# EAGLE board FT232-Breakout-v1 (EAGLE 6.4)
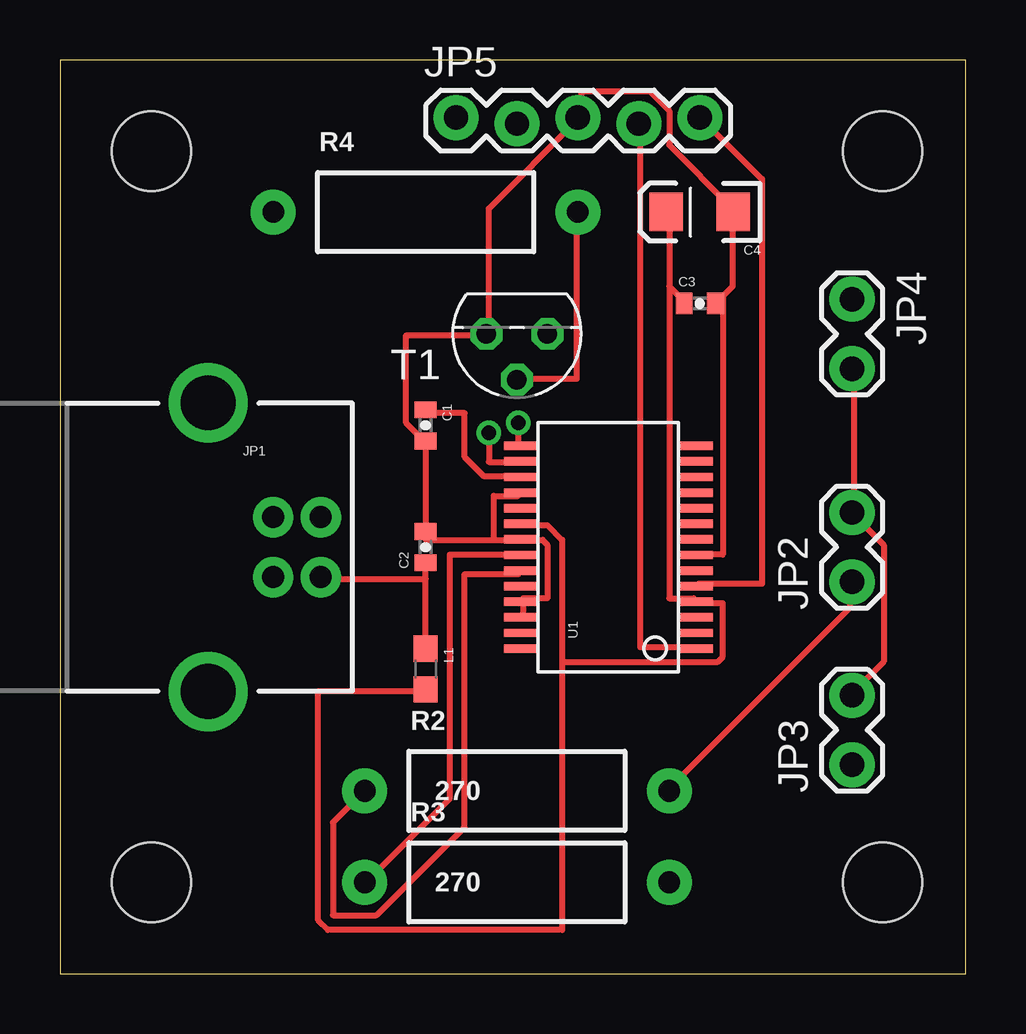
[diagram p0: board, top side]
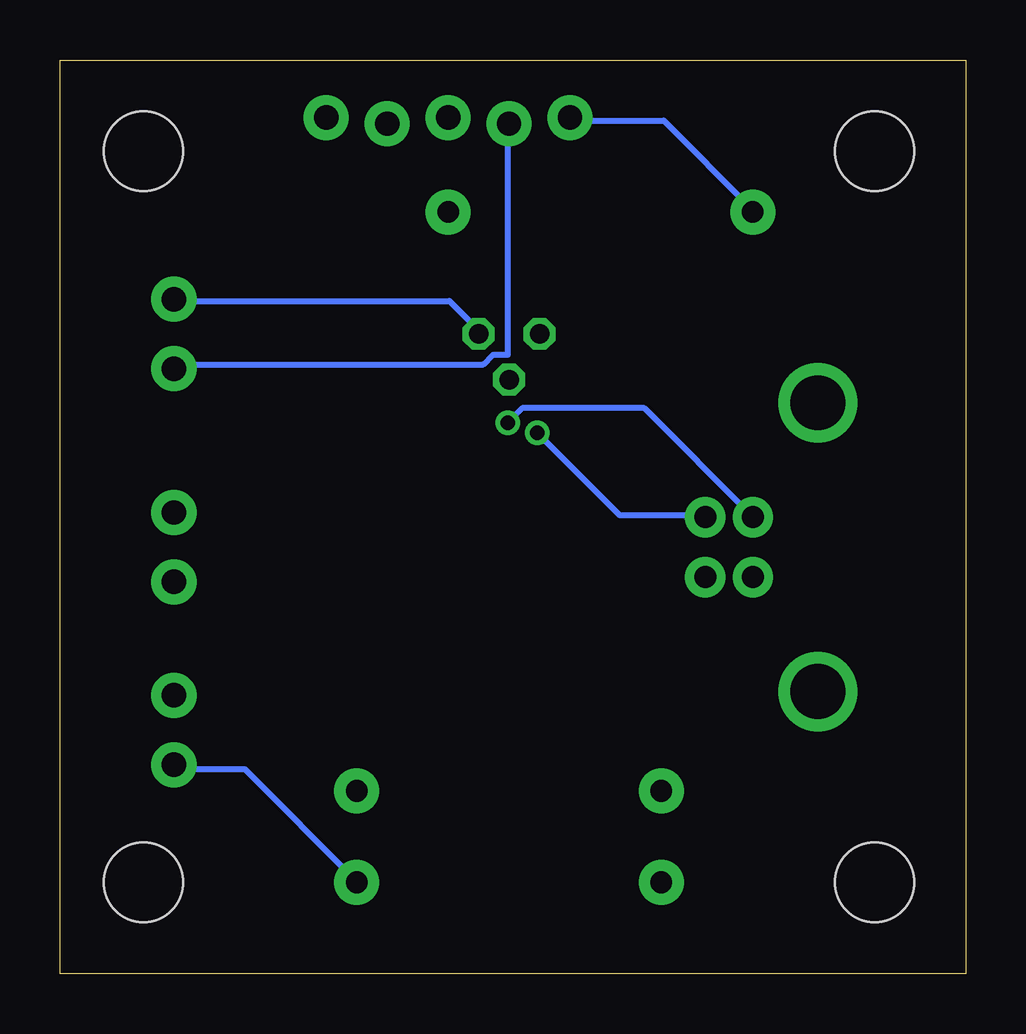
[diagram p1: board, bottom side, seen from below]

Size 37.77 x 38.09 mm. Coordinates in mm from the lower left corner, seen from the top.
Outline: 0,0 37.77,0 37.77,38.09 0,38.09 0,0
Copper layers (1*16): Top 0.035mm / dielectric 1.5mm / Bottom 0.035mm
Design rules "default": minimum track width 10mil, minimum drill 24mil, track to track 8mil, track to pad 8mil, pad to pad 8mil, via to via 8mil, smd to smd 8mil, copper to edge 40mil, drill to drill 8mil, minimum pad ring 10mil, minimum via ring 8mil, stop-mask expansion 4mil, vias tented up to drill 0mil, thermal gap 10mil

## Footprints (pad centres in the part's own frame; a part is rotated, then mirrored left to right if it is on the bottom)
0402-CAP = smd 0.7 x 0.9: 1 -0.65,0; 2 0.65,0
EIA3216 = smd 1.4 x 1.6: A 1.4,0; C -1.4,0
USB-B-PTH = drill 0.914 pad 1.676: D+ 0,1.25; D- 1.981,1.25; GND 0,-1.25; VBUS 1.981,-1.25 | drill 2.286: S1 -2.718,-6.02; S2 -2.718,6.02
1X02_LOCK = drill 1.016 pad 1.88: 1 -0.178,0; 2 2.718,0
1X05_LOCK = drill 1.016 pad 1.88: 1 0,0.127; 2 2.54,-0.127; 3 5.08,0.127; 4 7.62,-0.127; 5 10.16,0.127
0603 = smd 1.1 x 1: 1 -0.85,0; 2 0.85,0
AXIAL-0.5 = drill 0.9 pad 1.88: P$1 -6.35,0; P$2 6.35,0
TO92 = drill 0.813 octagon: 1 1.27,0; 2 0,1.905; 3 -1.27,0
SSOP28DB = smd 0.348 x 1.397: 1 -4.225,-3.656; 2 -3.575,-3.656; 3 -2.925,-3.656; 4 -2.275,-3.656; 5 -1.625,-3.656; 6 -0.975,-3.656; 7 -0.325,-3.656; 8 0.325,-3.656; 9 0.975,-3.656; 10 1.625,-3.656; 11 2.275,-3.656; 12 2.925,-3.656; 13 3.575,-3.656; 14 4.225,-3.656; 15 4.225,3.656; 16 3.575,3.656; 17 2.925,3.656; 18 2.275,3.656; 19 1.625,3.656; 20 0.975,3.656; 21 0.325,3.656; 22 -0.325,3.656; 23 -0.975,3.656; 24 -1.625,3.656; 25 -2.275,3.656; 26 -2.925,3.656; 27 -3.575,3.656; 28 -4.225,3.656
STAND-OFF = hole 3.302: 0,0

## Placement (x,y rotation side)
C1  0.1uF  [0402-CAP]  15.24,22.86 270 top
C2  10nF  [0402-CAP]  15.24,17.78 90 top
C3  0.1nF  [0402-CAP]  26.67,27.94 0 top
C4  10uF  [EIA3216]  26.67,31.75 180 top
JP1  USB-B  [USB-B-PTH]  8.89,17.78 0 top
JP2  TXLED  [1X02_LOCK]  33.02,16.51 90 top
JP3  RXLED  [1X02_LOCK]  33.02,8.89 90 top
JP4  Buzzer  [1X02_LOCK]  33.02,27.94 270 top
JP5  [1X05_LOCK]  16.51,35.56 0 top
L1  [0603]  15.24,12.7 270 top
R2  270  [AXIAL-0.5]  19.05,7.62 0 top
R3  270  [AXIAL-0.5]  19.05,3.81 0 top
R4  [AXIAL-0.5]  15.24,31.75 0 top
T1  BC547  [TO92]  19.05,26.67 180 top
U1  FT232RL-BASICSSOP  [SSOP28DB]  22.86,17.78 90 top
U$1  [STAND-OFF]  34.29,3.81 0 top
U$2  [STAND-OFF]  34.29,34.29 0 top
U$3  [STAND-OFF]  3.81,34.29 0 top
U$4  [STAND-OFF]  3.81,3.81 0 top

## Library data of the parts
C1-C3 = SparkFun-Capacitors; PROD_ID: CAP-09885
C4 = SparkFun-Capacitors; PROD_ID: CAP-00811
JP1 = SparkFun-Connectors; PROD_ID: CONN-08278
JP2-JP5 = SparkFun-Connectors
L1 R2-R4 = SparkFun-Passives
T1 = transistor
U1 = SparkFun-DigitalIC
U$1-U$4 = SparkFun-Electromechanical

## Nets
3.3V: C1.1 U1.17
BUZZIN: JP5.1 R4.P$1
GND: C1.2 C2.2 C3.2 C4.C JP5.3 T1.1 U1.7 U1.18 U1.21 U1.25 U1.26
N$1: C2.1 JP1.VBUS L1.1
N$2: R4.P$2 T1.2
N$3: JP3.1 R3.P$2
N$4: JP1.D- U1.16
N$5: JP1.D+ U1.15
N$6: JP4.1 T1.3
N$7: R3.P$1 U1.22
N$8: R2.P$1 U1.23
N$9: JP2.1 R2.P$2
RX: JP5.5 U1.5
TX: JP5.4 U1.1
V5: C3.1 C4.A L1.2 U1.4 U1.20
VCC: JP2.2 JP3.2 JP4.2 JP5.2

## Tracks (layer width: path | path; a pad name or v marks a point on that pad's centre or on a via)
3.3V
  Top 0.254: C1.1 15.24,23.37 16.87,23.37 16.87,21.54 17.68,20.73 19.1,20.73 U1.17
BUZZIN
  Bottom 0.254: R4.P$1 8.94,31.9 12.6,35.56 16.46,35.56 JP5.1
GND
  Top 0.254: 27.64,28.25 28.04,28.65 28.04,31.7 C4.C 28.04,31.9 25.4,34.54 25.4,35.97 24.59,36.78 21.74,36.78 21.74,35.76 JP5.3 21.54,35.56 17.88,31.9 17.88,26.82 T1.1 17.68,26.62 14.43,26.62 14.43,22.96 15.24,22.15 | 27.64,28.25 27.43,28.04 C3.2 27.64,28.25 | 27.64,28.25 27.64,17.48 26.62,17.48 U1.7 | U1.26 19.3,14.83 19.3,15.44 U1.25 19.3,15.65 20.32,15.65 20.32,17.88 20.12,18.09 19.3,18.09 U1.21 19.1,18.09 18.09,18.09 | 15.24,22.15 C2.2 15.24,18.09 18.09,18.09 | 18.09,18.09 18.09,19.91 19.1,19.91 U1.18 | 15.24,22.15 C1.2
N$1
  Top 0.254: L1.1 15.24,16.46 | 15.24,16.46 C2.1 | 15.24,16.46 10.97,16.46 JP1.VBUS
N$2
  Top 0.254: T1.2 19.1,24.79 21.54,24.79 21.54,31.7 R4.P$2
N$3
  Bottom 0.254: R3.P$2 25.4,3.86 30.07,8.53 32.92,8.53 JP3.1
N$4  (via drill 0.61)
  Top 0.254: v17.88,22.55 17.88,21.34 19.1,21.34 U1.16
  Bottom 0.254: v17.88,22.55 14.43,19.1 10.97,19.1 JP1.D-
N$5  (via drill 0.61)
  Top 0.254: v19.1,22.96 19.1,22.15 U1.15
  Bottom 0.254: v19.1,22.96 18.49,23.57 13.41,23.57 8.94,19.1 JP1.D+
N$6
  Bottom 0.254: T1.3 20.32,26.82 21.54,28.04 32.92,28.04 JP4.1
N$7
  Top 0.254: U1.22 19.1,17.48 16.26,17.48 16.26,7.32 12.8,3.86 R3.P$1
N$8
  Top 0.254: R2.P$1 11.38,6.3 11.38,2.44 13.21,2.44 16.87,6.1 16.87,16.66 19.1,16.66 U1.23
N$9
  Top 0.254: R2.P$2 25.4,7.72 32.92,15.24 32.92,16.26 JP2.1
RX
  Top 0.254: U1.5 26.62,16.26 29.26,16.26 29.26,33.12 26.82,35.56 JP5.5
TX
  Top 0.254: U1.1 26.42,13.61 24.18,13.61 24.18,35.36 JP5.4
V5
  Top 0.254: 25.4,28.65 26.01,28.04 C3.1 | 25.4,28.65 25.4,31.7 C4.A | 25.4,28.65 25.4,15.65 26.42,15.65 U1.4 26.62,15.44 27.64,15.44 27.64,13.21 27.43,13.01 20.93,13.01 | 20.93,13.01 20.93,18.09 20.32,18.69 19.3,18.69 U1.20 | 20.93,13.01 20.93,1.83 11.18,1.83 10.77,2.23 10.77,11.79 15.24,11.79 L1.2
VCC
  Top 0.254: JP3.2 33.12,11.79 34.34,13.01 34.34,17.88 33.12,19.1 JP2.2 33.12,19.3 33.12,25.2 JP4.2
  Bottom 0.254: JP5.2 19.1,35.36 19.1,25.81 19.71,25.81 20.12,25.4 32.92,25.4 JP4.2